# Altium PCB H0BR5.PcbDoc (part 2 of 2)
Units mil, origin at the board's own origin, x right, y up, seen from the top; angles counter-clockwise.
Board outline 1363.78 x 1181.1 mil, 2 copper layers (Top Layer, Bottom Layer); 40 components, 25 nets, 117 pads, 14 vias.
Unrouted connection lines stored in the file: 12.
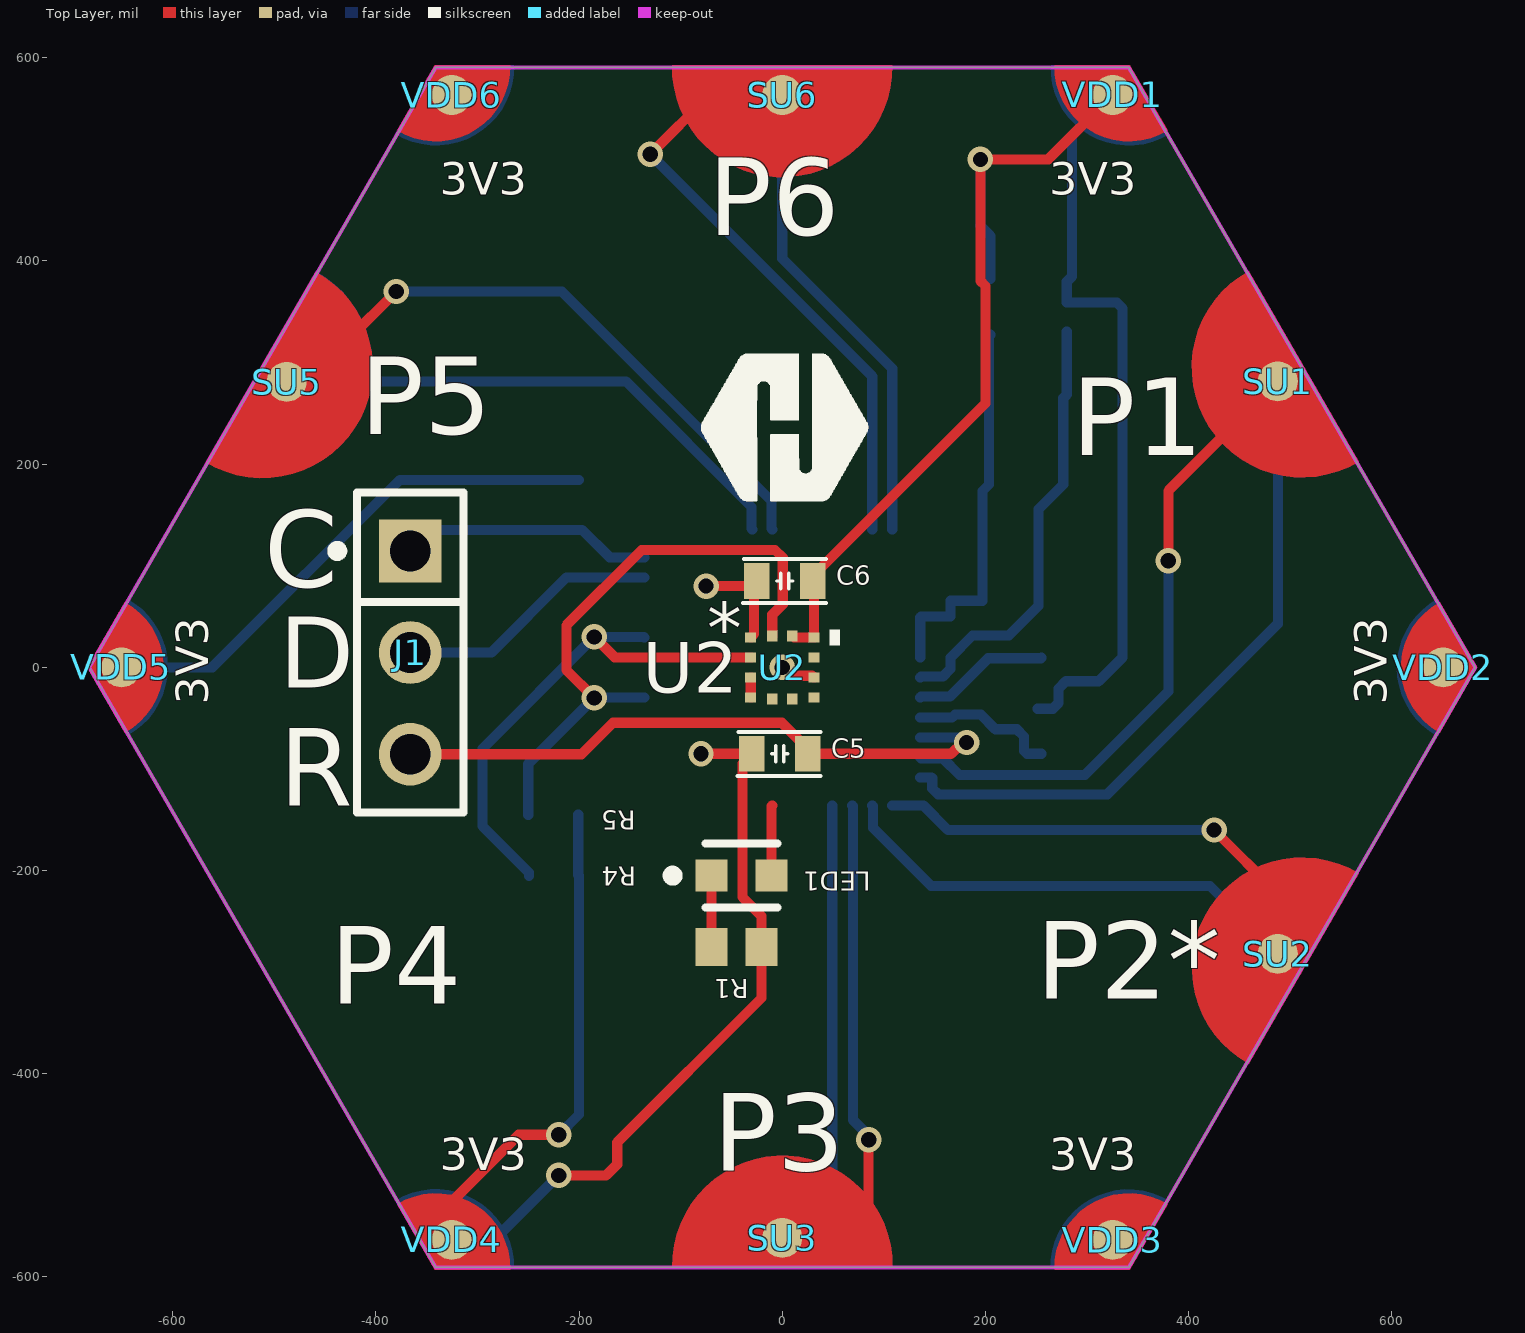
[diagram p0: Top Layer view]

## Via types
v1: diameter 25, hole 15, Top Layer to Bottom Layer, 14 vias

## Nets (pads, with @x,y where several pads share a name; then routed paths per layer and width w, separated by ;. In a path a pad name is that pad's centre, name@x,y a point inside that pad or via, vN(x,y) a via of type N, cw(c..) or ccw(c..) an arc to the next point about the centre after c; other vN are vias at no path point) (continued)
UART3_TX: (continued)
  Bottom Layer w10: v1(-130,505) 88.58,286.42 U1.47
UART4_RX: SD1.UART_D U1.12 | length 672.9
  Bottom Layer w10: U1.12 146.65,-108.27 147.56,-109.17 147.56,-119.14 153.42,-125 320,-125 487.8,42.8 SD1.UART_D
UART4_TX: SU1.UART_U U1.11 | length 635.2
  Top Layer w10: v1(380,105) 380,173.7 SU1.UART_U
  Bottom Layer w10: U1.11 136.61,-89.36 157.94,-89.36 174.46,-105.88 297.79,-105.88 380,-23.66 v1(380,105)
UART5_RX: SD5.UART_D U1.41 | length 531.1
  Bottom Layer w10: SD5.UART_D -153.86,281.5 -30.31,157.94 -30.31,136.61 U1.41
UART5_TX: SU5.UART_U U1.42 | length 627.7
  Top Layer w10: SU5.UART_U -447.08,321.83 -428.17,321.83 v1(-380,370)
  Bottom Layer w10: v1(-380,370) -216.91,370 -10.62,163.71 -10.62,136.61 U1.42
UART6_RX: SD3.UART_D U1.16 | length 446.1
  Bottom Layer w10: SD3.UART_D 49.21,-512.29 U1.16
UART6_TX: SU3.UART_U U1.15 | length 498.8
  Top Layer w10: SU3.UART_U 49.36,-561.5 53.41,-561.5 85,-529.91 v1(85,-465)
  Bottom Layer w10: U1.15 69.45,-136.38 69.45,-445.39 85,-460.94 v1(85,-465)
VDD: C6.2 D1.2 FB1.1 R4.1 R5.2 U2.10 U2.11 VDD1.Pwr_U VDD2.Pwr_U VDD3.Pwr_U VDD4.Pwr_U VDD5.Pwr_U VDD6.Pwr_U | length 1377.6
  Top Layer w10: -650.39,-24.62 VDD5.Pwr_U ; VDD4.Pwr_U@-341.56,-559.53 -337.7,-563.39 VDD4.Pwr_U -325.2,-525.86 -259.34,-460 v1(-220,-460) ; U2.11@11.4,29.53 U2.10 31.09,83.91 C6.2 30,89.92 200,259.92 200,375.43 195,380.43 v1(195,500) 261.81,500 VDD1.Pwr_U
  Bottom Layer w10: v1(-220,-460) -200,-440 R4.1 -200.79,-204.21 R5.2 ; v1(195,500) 195,435.27 D1.2 205,424.73 FB1.1
VDDA: C1.2 C2.1 C3.2 C4.2 FB1.2 U1.4 U1.5 U1.6 | length 381.7
  Bottom Layer w10: U1.6 U1.5 U1.4 136.61,49.99 165.56,49.99 165.56,65.59 C1.2 C3.2 197.07,173.57 C2.1 C4.2 203.5,325.94 FB1.2
VSSA: C1.1 C2.2 C3.1 C4.1 R3.2 U1.7 | length 433.3
  Bottom Layer w10: U1.7 136.61,-9.06 157.94,-9.06 165.56,-1.45 165.56,9.64 187.28,31.36 222.87,31.36 252.19,60.67 C1.1 C3.1 252.19,155.69 C2.2 C4.1 280,268.5 R3.2
pads on no net: U1.1 U1.2 U1.3 U1.17 U1.18 U1.21 U1.22 U1.23 U1.24 U1.25 U1.26 U1.27 U1.28 U1.30 U1.31 U1.33 U1.34 U1.37 U1.38 U1.39 U1.40 U1.43 U1.44 U1.45 U1.46 U2.6 U2.7 U2.9

## Keep-outs
Keep-Out Layer:
  the board outline again, w3.94

## Silkscreen, mask and mechanical layers (free items; w line width, h text height)
Top Overlay:
  drawing of 1337 lines, arcs and shapes, not listed
  text "3V3" at -337,465.01 h32
  text "3V3" at 263,465.01 h32
  text "P6" at -73.11,425.36 h76
  text "P5" at -415.23,229.56 h76
  text "P1" at 285,209.02 h76
  text "C" at -510,79.02 h76
  text "D" at -495,-19.99 h70
  text "3V3" at -565.01,-37 h32 r90
  text "3V3" at 594.99,-37 h32 r90
  text "R" at -495,-135.98 h76
  text "P2*" at 250,-325.98 h76
  text "P4" at -445,-330.98 h76
  text "3V3" at -337,-494.99 h32
  text "P3" at -68.14,-495.44 h76
  text "3V3" at 263,-494.99 h32
Bottom Overlay:
  text "GND" at 257,525.01 h32
  text "GND" at -253.7,455.18 h32
  text "P6" at 66.89,425.36 h76
  text "P5" at -310,234.02 h76
  text "P1" at 370,209.02 h76
  text "H0BR5" at 490,190 h70 r90
  text "GND" at -565.01,57 h32 r90
  text "GND" at 594.99,37 h32 r90
  text "P2*" at 390,-325.98 h76
  text "P4" at -340,-330.98 h76
  text "GND" at -337,-465.01 h32 r180
  text "GND" at 263,-465.01 h32 r180
  text "P3" at 71.86,-495.44 h76
Top Solder:
  drawing of 20 lines, arcs and shapes, not listed
Dimensions:
  the board outline again, w3.94

## Text inside footprints (layer, text, board x,y; h text height)
C2: Mechanical 32 "2" at 266.5,180 h25 r180; Mechanical 32 "1" at 193.5,180 h25 r180; Mechanical 33 "C40" at 313.5,187.17 h25 r180
C4: Mechanical 32 "2" at 213.5,265 h25; Mechanical 32 "1" at 286.5,265 h25; Mechanical 33 "C40" at 166.5,257.83 h25
U2: Top Overlay "*" at -74,14.37 h50; Mechanical 13 "*" at -38.17,14.37 h50